# EAGLE board Genius  (EAGLE 9.7.0)

Size 182.79 x 59.69 mm. Coordinates in mm from the lower left corner, seen from the top.
Outline: 0,0 182.79,0 182.79,59.69 0,59.69 0,0
Copper layers (1*16): Top 0.035mm / dielectric 1.5mm / Bottom 0.035mm
Design rules "default": minimum track width 6mil, minimum drill 0.35mm, track to track 6mil, track to pad 6mil, pad to pad 6mil, via to via 6mil, smd to smd 6mil, copper to edge 40mil, drill to drill 6mil, minimum pad ring 10mil, minimum via ring 8mil, stop-mask expansion 4mil, vias tented up to drill 0mil, thermal gap 10mil

## Footprints (pad centres in the part's own frame; a part is rotated, then mirrored left to right if it is on the bottom)
LEDRD254W60D565H860B_G = drill 0.981 pad 1.581: 1 -1.27,0; 2 1.27,0
LEDRD254W60D565H860B_Y = drill 0.981 pad 1.581: 1 -1.27,0; 2 1.27,0
LEDRD254W60D565H860B_B = drill 0.981 pad 1.581: 1 -1.27,0; 2 1.27,0
LEDRD254W60D565H860B = drill 0.981 pad 1.581: 1 -1.27,0; 2 1.27,0
PIEZO = drill 1 pad 1.6: 1 -3.5,0; 2 3.5,0
RESAD1016W63L850D250B = drill 0.83 pad 1.43: 1 -5.08,0; 2 5.08,0
SWITCH-MOMENTARY-PTH-6.5MM = drill 1.016 pad 1.88: 1 -3.251,2.261; 2 3.251,2.261; 3 -3.251,-2.261; 4 3.251,-2.261
ARDUINO-UNO-R3-SHIELD = drill 1.016 pad 1.88: 3.3V 24.13,-2.54; 5V 24.13,0; A0 24.13,12.7; A1 24.13,15.24; A2 24.13,17.78; A3 24.13,20.32; A4 24.13,22.86; A5 24.13,25.4; AREF -24.13,-13.97; D2 -24.13,20.32; D3 -24.13,17.78; D4 -24.13,15.24; D5 -24.13,12.7; D6 -24.13,10.16; D7 -24.13,7.62; D8 -24.13,3.81; D9 -24.13,1.27; D10 -24.13,-1.27; D11 -24.13,-3.81; D12 -24.13,-6.35; D13 -24.13,-8.89; GND@0 24.13,2.54; GND@1 24.13,5.08; GND@2 -24.13,-11.43; IOREF 24.13,-7.62; NC 24.13,-10.16; RES 24.13,-5.08; RX -24.13,25.4; SCL -24.13,-19.05; SDA -24.13,-16.51; TX -24.13,22.86; VIN 24.13,7.62

## Placement (x,y rotation side)
DL1  GREEN  [LEDRD254W60D565H860B_G]  137.46,33.55 180 top
DL2  YELLOW  [LEDRD254W60D565H860B_Y]  137.46,25.93 180 top
DL3  BLUE  [LEDRD254W60D565H860B_B]  127.3,25.93 180 top
DL4  RED  [LEDRD254W60D565H860B]  127.3,33.55 180 top
PIEZO1  PIEZO  [PIEZO]  169.21,29.74 270 top
RR5  0.5k  [RESAD1016W63L850D250B]  136.19,48.79 90 top
RR6  0.5k  [RESAD1016W63L850D250B]  136.19,13.23 90 top
RR7  0.5k  [RESAD1016W63L850D250B]  126.03,13.23 90 top
RR8  0.5k  [RESAD1016W63L850D250B]  126.03,48.79 90 top
SB1  SWITCH_MOMENTARY  [SWITCH-MOMENTARY-PTH-6.5MM]  151.43,37.36 90 top
SB2  SWITCH_MOMENTARY  [SWITCH-MOMENTARY-PTH-6.5MM]  151.43,22.12 90 top
SB3  SWITCH_MOMENTARY  [SWITCH-MOMENTARY-PTH-6.5MM]  113.33,22.12 90 top
SB4  SWITCH_MOMENTARY  [SWITCH-MOMENTARY-PTH-6.5MM]  113.33,37.36 90 top
U1  ARDUINO-UNO-R3-SHIELD  [ARDUINO-UNO-R3-SHIELD]  47.88,29.84 270 top

## Library data of the parts
DL1 = Tinkercad; CATEGORY: Opto-Electronic; SUB-CATEGORY: LED; VALUE: LED_GREEN
DL2 = Tinkercad; CATEGORY: Opto-Electronic; SUB-CATEGORY: LED; VALUE: LED_YELLOW
DL3 = Tinkercad; CATEGORY: Opto-Electronic; SUB-CATEGORY: LED; VALUE: LED_BLUE
DL4 = Tinkercad; CATEGORY: Opto-Electronic; SUB-CATEGORY: LED; VALUE: LED_RED
PIEZO1 RR5-RR8 SB1-SB4 U1 = Tinkercad

## Nets
DL1_C: DL1.2 RR5.1
DL2_C: DL2.2 RR6.2
DL3_C: DL3.2 RR7.2
DL4_C: DL4.2 RR8.1
U1_D2: DL4.1 U1.D2
U1_D3: DL1.1 U1.D3
U1_D4: DL2.1 U1.D4
U1_D5: DL3.1 U1.D5
U1_D6: SB4.1 SB4.2 U1.D6
U1_D7: SB1.3 SB1.4 U1.D7
U1_D8: SB2.3 SB2.4 U1.D8
U1_D9: SB3.1 SB3.2 U1.D9
U1_D12: PIEZO1.1 U1.D12
U1_GND: PIEZO1.2 RR5.2 RR6.1 RR7.1 RR8.2 SB1.1 SB1.2 SB2.1 SB2.2 SB3.3 SB3.4 SB4.3 SB4.4 U1.GND@0 U1.GND@1 U1.GND@2

## Tracks (layer width: path | path; a pad name or v marks a point on that pad's centre or on a via)
DL1_C  (1 unrouted)
DL2_C  (1 unrouted)
DL3_C  (1 unrouted)
DL4_C  (1 unrouted)
U1_D2  (1 unrouted)
U1_D3  (1 unrouted)
U1_D4  (1 unrouted)
U1_D5  (1 unrouted)
U1_D6  (2 unrouted)
U1_D7  (2 unrouted)
U1_D8  (2 unrouted)
U1_D9  (2 unrouted)
U1_D12  (1 unrouted)
U1_GND  (15 unrouted)